# Altium PCB LTC6811_proto.PcbDoc
Units mm, origin at the board's own origin, x right, y up, seen from the top; angles counter-clockwise.
Board outline 30 x 86 mm, 2 copper layers (Top Layer, Bottom Layer), stack 1.57 mm thick; 8 components, 64 nets, 128 pads, 0 vias.
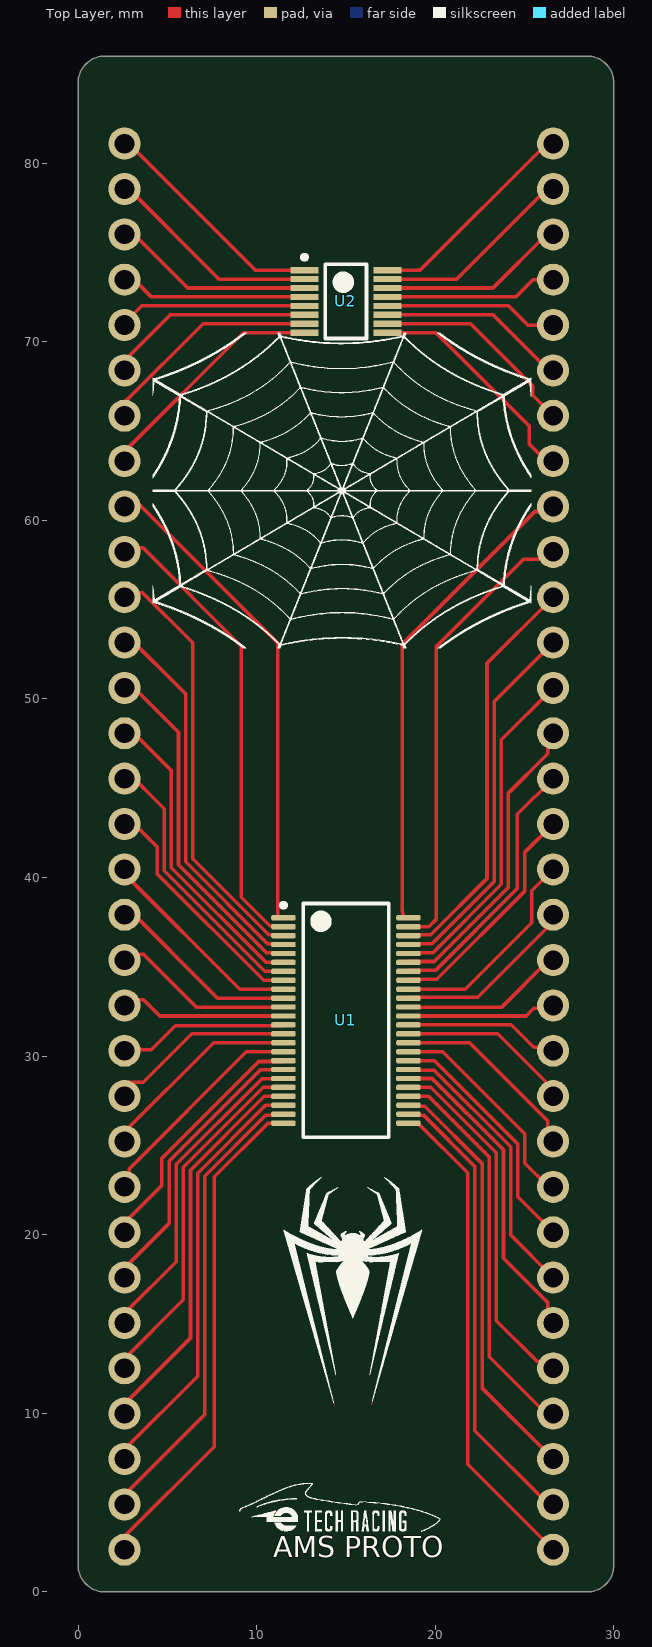
[diagram p0: Top Layer view]
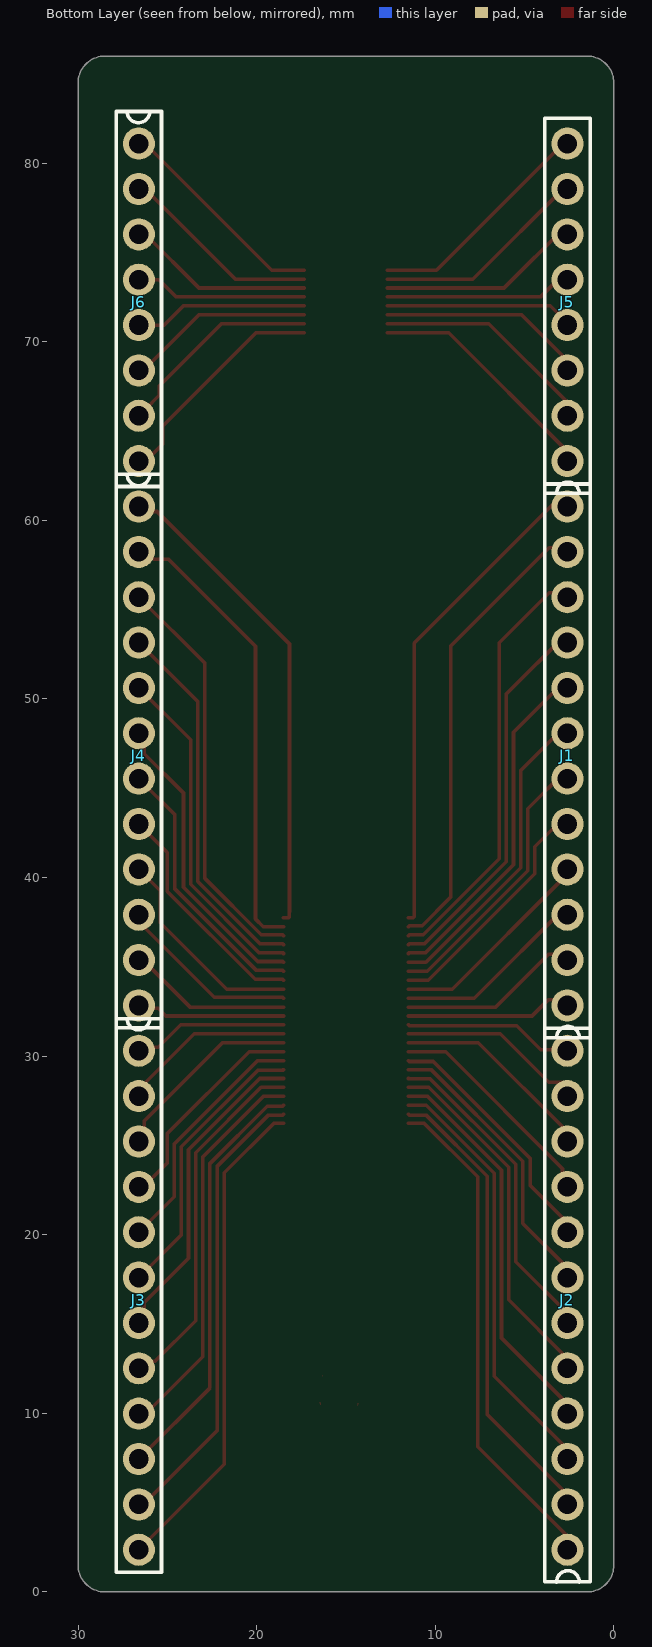
[diagram p1: Bottom Layer view, seen from below]
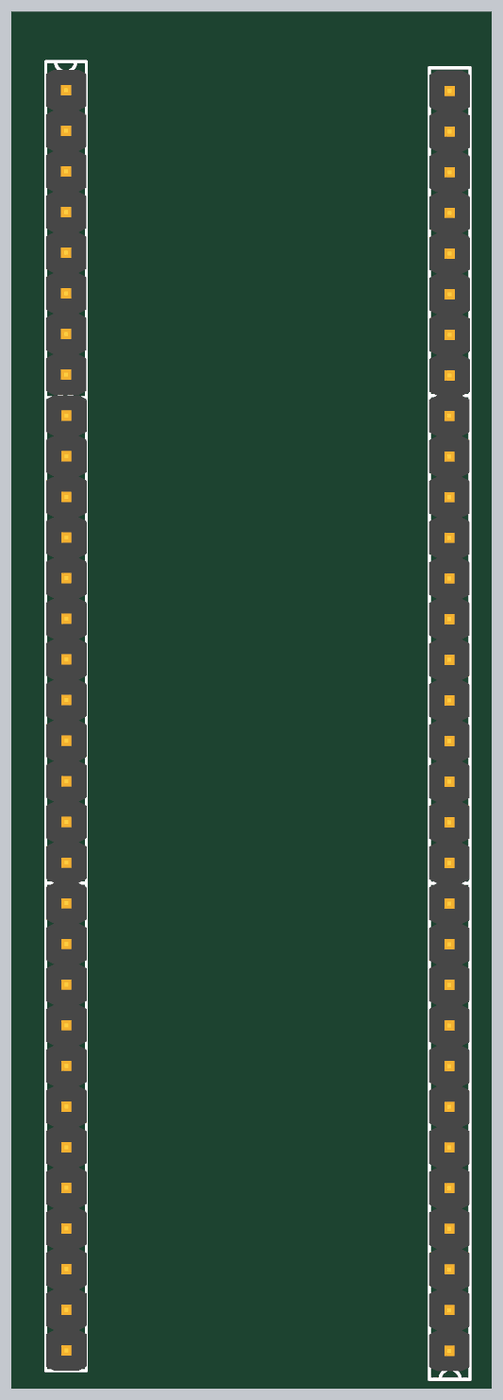
[diagram p2: 3D render of the assembled board from below, using the file's embedded part models]

## Layer stack, top to bottom
Top Solder: solder mask 0.01, Solder Resist, Dk 3.5
Top Layer: signal copper 0.035
Dielectric 1: dielectric 1.5, FR-4, Dk 4.8
Bottom Layer: signal copper 0.035
Bottom Solder: solder mask 0.01, Solder Resist, Dk 3.5

## Board outline
0,1.5 0,84.5 cw(c1.5,84.5) 1.5,86 28.5,86 cw(c28.5,84.5) 30,84.5 30,1.5 cw(c28.5,1.5) 28.5,0 1.5,0 cw(c1.5,1.5)

## Design rules (kind name [scope] priority, off if disabled: settings)
Clearance [All] p1: gap=0.2 ignorepadtopadclearanceinfootprint=FALSE
PolygonConnect [All] p1: connectstyle=Relief reliefconductorwidth=0.254 reliefentries=4 polygonreliefangle="90 Angle" airgapwidth=0.254
RoutingVias [All] p1: holewidth=0.711 width=1.27 viastyle="Through Hole" minholewidth=0.711 minwidth=1.27 maxholewidth=0.711 maxwidth=1.27
SolderMaskExpansion [All] p1: expansion=0.102 istentingtop=FALSE
Width [All] p1: maxlimit=0.5 minlimit=0.2 preferedwidth=0.254
30 further rules are at their usual default settings.

## Classes and differential pairs
component class Sheet1: J1 J2 J3 J4 J5 J6 U1

## Components (designator, comment, footprint, x,y, rotation, side; value= is the part's Value field where it differs from the comment)
J1 "61301211121" J_Pinheader_1x12 2.6,45.54 r0 bottom
J2 "61301211121" J_Pinheader_1x12 2.6,15.06 r0 bottom
J3 "61301211121" J_Pinheader_1x12 26.6,17.6 r180 bottom
J4 "61301211121" J_Pinheader_1x12 26.6,48.08 r180 bottom
J5 "61301211121" J_Pinheader_1x8 2.6,76.02 r0 bottom
J6 "61301211121" J_Pinheader_1x8 26.6,68.4 r180 bottom
U1 "LTC6811-1" U_LTC6811G-2 15,32 r0 top
U2 "LTC6820" LTC6820 15,72.263 r0 top

## Footprints (in the part's own frame and the unit in brackets; to place one, negate y for a bottom-side part, rotate by r counter-clockwise, add the part's x,y. Pads: shape width x height; smd on the part's side, far side on the other; paste and mask are expansions set on the pad)
J_Pinheader_1x8 [mm]
  round 1.8 hole 1.1: 1(0,12.7) 2(0,10.16) 3(0,7.62) 4(0,5.08) 5(0,2.54) 6(0,0) 7(0,-2.54) 8(0,-5.08)
  silkscreen extent -1.27,-6.5 1.27,14.5, body extent -1.26,-6.32 1.28,14, height 8.77
J_Pinheader_1x12 [mm]
  round 1.8 hole 1.1: 1(0,12.7) 2(0,10.16) 3(0,7.62) 4(0,5.08) 5(0,2.54) 6(0,0) 7(0,-2.54) 8(0,-5.08) 9(0,-7.62) 10(0,-10.16) 11(0,-12.7) 12(0,-15.24)
  silkscreen extent -1.27,-16.5 1.27,14.5, body extent -1.25,-16.5 1.29,13.98, height 8.77
LTC6820 [mm]
  rect 1.55x0.35 smd: 1(-2.325,1.75) 2(-2.325,1.25) 3(-2.325,0.75) 4(-2.325,0.25) 5(-2.325,-0.25) 6(-2.325,-0.75) 7(-2.325,-1.25) 8(-2.325,-1.75) 9(2.325,-1.75) 10(2.325,-1.25) 11(2.325,-0.75) 12(2.325,-0.25) 13(2.325,0.25) 14(2.325,0.75) 15(2.325,1.25) 16(2.325,1.75)
  silkscreen extent -2.45,-2.08 1.15,2.6, body extent -2.45,-2.05 2.45,2.05, height 1.1
U_LTC6811G-2 [mm] "SSOP, 48-Leads, Body 12,80x5,30mm, Pitch 0,50mm, IPC Medium Density"
  rrect50% 1.37x0.3 smd: 1(-3.5,5.75) 2(-3.5,5.25) 3(-3.5,4.75) 4(-3.5,4.25) 5(-3.5,3.75) 6(-3.5,3.25) 7(-3.5,2.75) 8(-3.5,2.25) 9(-3.5,1.75) 10(-3.5,1.25) 11(-3.5,0.75) 12(-3.5,0.25) 13(-3.5,-0.25) 14(-3.5,-0.75) 15(-3.5,-1.25) 16(-3.5,-1.75) 17(-3.5,-2.25) 18(-3.5,-2.75) 19(-3.5,-3.25) 20(-3.5,-3.75) 21(-3.5,-4.25) 22(-3.5,-4.75) 23(-3.5,-5.25) 24(-3.5,-5.75) 25(3.5,-5.75) 26(3.5,-5.25) 27(3.5,-4.75) 28(3.5,-4.25) 29(3.5,-3.75) 30(3.5,-3.25) 31(3.5,-2.75) 32(3.5,-2.25) 33(3.5,-1.75) 34(3.5,-1.25) 35(3.5,-0.75) 36(3.5,-0.25) 37(3.5,0.25) 38(3.5,0.75) 39(3.5,1.25) 40(3.5,1.75) 41(3.5,2.25) 42(3.5,2.75) 43(3.5,3.25) 44(3.5,3.75) 45(3.5,4.25) 46(3.5,4.75) 47(3.5,5.25) 48(3.5,5.75)
  silkscreen extent -3.62,-6.55 2.4,6.57, body extent -3.9,-6.4 3.9,6.4, height 2

## Part data
J1 J2 J3 J4: library part J_Pinheader_1x12, "THT Vertical Pin Header WR-PHD, Pitch 2.54 mm, Single Row, 12 pins", Color=Black, Manufacturer 1="Wurth Electronics", Category=Connectors, ComponentLink1Description=http://www.farnell.com/cad/1737268.pdf?src-supplier=Element14, ComponentLink1URL=http://www.farnell.com/cad/1737268.pdf?src-supplier=Element14, ComponentLink2Description=https://katalog.we-online.de/em/datasheet/6130xx11121.pdf?src-supplier=Digi-Key, ComponentLink2URL=https://katalog.we-online.de/em/datasheet/6130xx11121.pdf?src-supplier=Digi-Key, Connector Type="Male Pin", Contact Material=Copper, Contact Mating Length=0.236inch, Contact Plating=Gold, Gender=Male, Manufacturer Part Number 1=61301211121, Mount="Through Hole", Number of Contacts=12, Number of Positions=12, Number of Rows=1, Packaging=Bulk, Pitch=0.1inch, Pricing 1="1=0,57000, 10=0,48400, 25=0,40400, 50=0,33700, 100=0,30600, 1000=0,27800 (USD)", REACH SVHC=Unknown, RoHS=Yes, RoHS Compliant=Yes, Stock 1=2124, Supplier 1=Digi-Key, Termination=Solder
J5 J6: library part J_Pinheader_1x8, "THT Vertical Pin Header WR-PHD, Pitch 2.54 mm, Single Row, 12 pins", Color=Black, Manufacturer 1="Wurth Electronics", Category=Connectors, ComponentLink1Description=http://www.farnell.com/cad/1737268.pdf?src-supplier=Element14, ComponentLink1URL=http://www.farnell.com/cad/1737268.pdf?src-supplier=Element14, ComponentLink2Description=https://katalog.we-online.de/em/datasheet/6130xx11121.pdf?src-supplier=Digi-Key, ComponentLink2URL=https://katalog.we-online.de/em/datasheet/6130xx11121.pdf?src-supplier=Digi-Key, Connector Type="Male Pin", Contact Material=Copper, Contact Mating Length=0.236inch, Contact Plating=Gold, Gender=Male, Manufacturer Part Number 1=61301211121, Mount="Through Hole", Number of Contacts=12, Number of Positions=12, Number of Rows=1, Packaging=Bulk, Pitch=0.1inch, Pricing 1="1=0,57000, 10=0,48400, 25=0,40400, 50=0,33700, 100=0,30600, 1000=0,27800 (USD)", REACH SVHC=Unknown, RoHS=Yes, RoHS Compliant=Yes, Stock 1=2124, Supplier 1=Digi-Key, Termination=Solder
U1: library part U_LTC6811-1, "12 Channel Multicell Battery Monitor with Daisy Chain Interface, Generation 4", Case/Package=SSOP, Manufacturer="Analog Devices / Linear Technology", Manufacturer 1="Analog Devices", Manufacturer Part Number=LTC6811HG-1#PBF, Supplier Part Number 1=505-LTC6811HG-1#PBF-ND, .Creator=GP, Category="Battery Management", ComponentLink1Description=Datasheet, ComponentLink1URL=https://www.analog.com/media/en/technical-documentation/data-sheets/ltc6811-1-6811-2.pdf, ComponentLink2Description="Where buy it", ComponentLink2URL=https://www.mouser.es/ProductDetail/Analog-Devices/LTC6811IG-23ZZTRPBF?qs=byeeYqUIh0NWJgxDt7RX5g%3D%3D, ComponentLink3Description=http://www.linear.com/docs/55980?src-supplier=Digi-Key, ComponentLink3URL=http://www.linear.com/docs/55980?src-supplier=Digi-Key, ComponentLink4Description=https://datasheet.octopart.com/LTC6811HG-1%23PBF-Analog-Devices-datasheet-138896417.pdf?src-supplier=Upverter, ComponentLink4URL=https://datasheet.octopart.com/LTC6811HG-1%23PBF-Analog-Devices-datasheet-138896417.pdf?src-supplier=Upverter, ComponentLink5Description=https://datasheet.octopart.com/LTC6811HG-1%23PBF-Linear-Technology-datasheet-66874450.pdf?src-supplier=Linear+Technology, ComponentLink5URL=https://datasheet.octopart.com/LTC6811HG-1%23PBF-Linear-Technology-datasheet-66874450.pdf?src-supplier=Linear+Technology, ComponentLink6Description=https://sigma.octopart.com/57702806/technical_drawing/Linear-Technology-LTC6811HG-1%23PBF.pdf?src-supplier=Linear+Technology, ComponentLink6URL=https://sigma.octopart.com/57702806/technical_drawing/Linear-Technology-LTC6811HG-1%23PBF.pdf?src-supplier=Linear+Technology, ComponentLink7Description=https://datasheet.octopart.com/LTC6811HG-1%23PBF-Analog-Devices-datasheet-138896417.pdf?src-supplier=Element14, ComponentLink7URL=https://datasheet.octopart.com/LTC6811HG-1%23PBF-Analog-Devices-datasheet-138896417.pdf?src-supplier=Element14, Manufacturer Part Number 1=LTC6811-1, Pricing 2="1=21,6, 10=19,92, 50=19,02, 100=19,02, 1000=15,13, 10000=15,13 (USD)", RoHS=Yes, RoHS Compliant=Yes, Stock 2=3108, Supplier 1=Digi-Key, Supplier 2=Mouser, Supplier Part Number 2=584-LTC6811HG-1#PBF
U2: library part U_LTC6820

## Nets (pads, with @x,y where several pads share a name; then routed paths per layer and width w, separated by ;. In a path a pad name is that pad's centre, name@x,y a point inside that pad or via, vN(x,y) a via of type N, cw(c..) or ccw(c..) an arc to the next point about the centre after c; other vN are vias at no path point)
NetJ1_1: J1.1 U1.12 | length 9.4
  Top Layer w0.2: J1.1@2.6,33.38 2.833,33.147 3.683,33.147 4.58,32.25 U1.12
NetJ1_2: J1.2 U1.11 | length 10.2
  Top Layer w0.2: J1.2@2.6,35.92 2.824,35.696 3.674,35.696 6.62,32.75 U1.11
NetJ1_3: J1.3 U1.10 | length 11.1
  Top Layer w0.2: J1.3@2.6,38.46 7.81,33.25 U1.10
NetJ1_4: J1.4 U1.9 | length 12.4
  Top Layer w0.2: J1.4@2.6,41 2.848,40.752 2.848,39.951 9.049,33.75 U1.9
NetJ1_5: J1.5 U1.8 | length 13.6
  Top Layer w0.2: J1.5@2.6,43.54 4.42,41.72 4.42,40.22 10.391,34.25 U1.8
NetJ1_6: J1.6 U1.7 | length 15.6
  Top Layer w0.2: J1.6@2.6,46.08 4.82,43.86 4.82,40.386 10.456,34.75 U1.7
NetJ1_7: J1.7 U1.6 | length 17.6
  Top Layer w0.2: J1.7@2.6,48.62 5.22,46 5.22,40.552 10.522,35.25 U1.6
NetJ1_8: J1.8 U1.5 | length 19.6
  Top Layer w0.2: J1.8@2.6,51.16 5.62,48.14 5.62,40.717 10.538,35.8 11.45,35.8 U1.5
NetJ1_9: J1.9 U1.4 | length 21.6
  Top Layer w0.2: J1.9@2.6,53.7 6.02,50.28 6.02,40.883 10.603,36.3 11.45,36.3 U1.4
NetJ1_10: J1.10 U1.3 | length 24.1
  Top Layer w0.2: J1.10@2.6,56.24 2.887,55.953 3.61,55.953 6.42,53.143 6.42,41.049 10.669,36.8 11.45,36.8 U1.3
NetJ1_11: J1.11 U1.2 | length 26.1
  Top Layer w0.2: J1.11@2.6,58.78 2.906,58.474 3.629,58.474 9.144,52.959 9.144,38.891 10.735,37.3 11.45,37.3 U1.2
NetJ1_12: J1.12 U1.1 | length 27.6
  Top Layer w0.2: J1.12@2.6,61.32 2.988,61.32 11.176,53.132 11.176,37.8 11.226,37.75 U1.1
NetJ2_1: J2.1 U1.24 | length 27.5
  Top Layer w0.2: J2.1@2.6,2.9 2.6,3.108 7.62,8.128 7.62,23.241 10.629,26.25 U1.24
NetJ2_2: J2.2 U1.23 | length 25.5
  Top Layer w0.2: J2.2@2.6,5.44 7.093,9.933 7.093,23.28 10.515,26.702 11.452,26.702 U1.23
NetJ2_3: J2.3 U1.22 | length 23.5
  Top Layer w0.2: J2.3@2.6,7.98 6.693,12.073 6.693,23.445 10.498,27.25 U1.22
NetJ2_4: J2.4 U1.21 | length 21.5
  Top Layer w0.2: J2.4@2.6,10.52 6.293,14.213 6.293,23.611 10.432,27.75 U1.21
NetJ2_5: J2.5 U1.20 | length 19.5
  Top Layer w0.2: J2.5@2.6,13.06 5.893,16.353 5.893,23.777 10.366,28.25 U1.20
NetJ2_6: J2.6 U1.19 | length 17.5
  Top Layer w0.2: J2.6@2.6,15.6 5.493,18.493 5.493,23.942 10.294,28.743 11.493,28.743 U1.19
NetJ2_7: J2.7 U1.18 | length 15.5
  Top Layer w0.2: J2.7@2.6,18.14 5.093,20.633 5.093,24.108 10.235,29.25 U1.18
NetJ2_8: J2.8 U1.17 | length 13.5
  Top Layer w0.2: J2.8@2.6,20.68 4.693,22.773 4.693,24.274 10.119,29.7 10.8,29.7 11.45,29.7 U1.17
NetJ2_9: J2.9 U1.16 | length 12
  Top Layer w0.2: J2.9@2.6,23.22 2.675,23.22 2.875,23.419 2.875,23.703 9.422,30.25 U1.16
NetJ2_10: J2.10 U1.15 | length 11
  Top Layer w0.2: J2.10@2.6,25.76 7.59,30.75 U1.15
NetJ2_11: J2.11 U1.14 | length 10.1
  Top Layer w0.2: J2.11@2.6,28.3 2.845,28.545 3.653,28.545 6.358,31.25 U1.14
NetJ2_12: J2.12 U1.13 | length 9.7
  Top Layer w0.2: J2.12@2.6,30.84 3.03,30.84 3.517,30.353 4.087,30.353 5.434,31.7 10.8,31.7 11.45,31.7 U1.13
NetJ3_1: J3.1 U1.36 | length 8.7
  Top Layer w0.2: U1.36 24.257,31.75 25.517,30.49 26.41,30.49 J3.1
NetJ3_2: J3.2 U1.35 | length 9.8
  Top Layer w0.2: U1.35 19.085,31.25 23.499,31.25 26.6,28.149 J3.2
NetJ3_3: J3.3 U1.34 | length 10.9
  Top Layer w0.2: U1.34 21.913,30.75 26.294,26.369 26.294,25.526 J3.3
NetJ3_4: J3.4 U1.33 | length 12.2
  Top Layer w0.2: U1.33 20.423,30.25 25.019,25.654 25.019,24.003 26.342,22.68 J3.4
NetJ3_5: J3.5 U1.32 | length 13.8
  Top Layer w0.2: U1.32 19.953,29.75 24.619,25.084 24.619,22.121 J3.5
NetJ3_6: J3.6 U1.31 | length 15.8
  Top Layer w0.2: U1.31 18.55,29.2 19.937,29.2 24.219,24.918 24.219,19.981 J3.6
NetJ3_7: J3.7 U1.30 | length 17.8
  Top Layer w0.2: U1.30 19.822,28.75 23.819,24.753 23.819,18.684 26.294,16.209 26.294,15.366 J3.7
NetJ3_8: J3.8 U1.29 | length 20.1
  Top Layer w0.2: U1.29 19.756,28.25 23.419,24.587 23.419,15.189 25.695,12.913 25.775,12.913 26.167,12.52 J3.8
NetJ3_9: J3.9 U1.28 | length 22
  Top Layer w0.2: U1.28 19.621,27.75 23.019,24.352 23.019,13.176 26.215,9.98 J3.9
NetJ3_10: J3.10 U1.27 | length 23.7
  Top Layer w0.2: U1.27 18.55,27.2 19.409,27.2 22.619,23.99 22.619,11.421 J3.10
NetJ3_11: J3.11 U1.26 | length 25.8
  Top Layer w0.2: U1.26 18.55,26.7 19.343,26.7 22.219,23.824 22.219,9.023 26.342,4.9 J3.11
NetJ3_12: J3.12 U1.25 | length 27.6
  Top Layer w0.2: U1.25 19.035,26.25 21.819,23.466 21.819,7.141 J3.12
NetJ4_1: J4.1 U1.48 | length 27.3
  Top Layer w0.2: U1.48 18.217,37.75 18.167,37.8 18.167,38.083 18.161,38.089 18.161,53.08 25.582,60.501 26.321,60.501 J4.1
NetJ4_2: J4.2 U1.47 | length 25.7
  Top Layer w0.2: U1.47 19.632,37.25 20.066,37.684 20.066,52.956 24.947,57.837 25.764,57.837 26.167,58.24 J4.2
NetJ4_3: J4.3 U1.46 | length 23
  Top Layer w0.2: U1.46 18.55,36.8 19.748,36.8 22.898,39.95 22.898,51.998 J4.3
NetJ4_4: J4.4 U1.45 | length 21
  Top Layer w0.2: U1.45 18.55,36.3 19.813,36.3 23.298,39.785 23.298,49.858 J4.4
NetJ4_5: J4.5 U1.44 | length 19
  Top Layer w0.2: U1.44 18.55,35.8 19.879,35.8 23.698,39.619 23.698,47.718 J4.5
NetJ4_6: J4.6 U1.43 | length 17
  Top Layer w0.2: U1.43 18.55,35.3 19.945,35.3 24.098,39.453 24.098,44.735 26.294,46.931 26.294,47.774 J4.6
NetJ4_7: J4.7 U1.42 | length 15
  Top Layer w0.2: U1.42 18.55,34.8 20.01,34.8 24.6,39.39 24.6,43.54 J4.7
NetJ4_8: J4.8 U1.41 | length 13
  Top Layer w0.2: U1.41 18.55,34.3 20.076,34.3 25,39.224 25,41.4 J4.8
NetJ4_9: J4.9 U1.40 | length 11.9
  Top Layer w0.2: U1.40 21.685,33.75 25.4,37.465 25.4,39.26 J4.9
NetJ4_10: J4.10 U1.39 | length 10.3
  Top Layer w0.2: U1.39 18.55,33.3 19.2,33.3 22.378,33.3 26.6,37.522 J4.10
NetJ4_11: J4.11 U1.38 | length 9.2
  Top Layer w0.2: U1.38 23.733,32.75 26.363,35.38 J4.11
NetJ4_12: J4.12 U1.37 | length 8.3
  Top Layer w0.2: U1.37 25.086,32.25 25.517,32.681 26.441,32.681 J4.12
NetJ5_1: J5.1 U2.8 | length 12.8
  Top Layer w0.2: J5.1@2.6,63.86 9.253,70.513 U2.8
NetJ5_2: J5.2 U2.7 | length 12.1
  Top Layer w0.2: J5.2@2.6,66.4 2.6,66.608 7.005,71.013 U2.7
NetJ5_3: J5.3 U2.6 | length 11.1
  Top Layer w0.2: J5.3@2.6,68.94 5.173,71.513 U2.6
NetJ5_4: J5.4 U2.5 | length 10.3
  Top Layer w0.2: J5.4@2.6,71.48 3.033,71.48 3.566,72.013 U2.5
NetJ5_5: J5.5 U2.4 | length 10.7
  Top Layer w0.2: J5.5@2.6,74.02 4.107,72.513 U2.4
NetJ5_6: J5.6 U2.3 | length 11.5
  Top Layer w0.2: J5.6@2.6,76.56 6.147,73.013 U2.3
NetJ5_7: J5.7 U2.2 | length 12.6
  Top Layer w0.2: J5.7@2.6,79.1 2.6,78.807 7.894,73.513 U2.2
NetJ5_8: J5.8 U2.1 | length 13.4
  Top Layer w0.2: J5.8@2.6,81.64 2.6,81.347 9.934,74.013 U2.1
NetJ6_1: J6.1 U2.16 | length 12.2
  Top Layer w0.2: U2.16 19.149,74.013 26.236,81.1 J6.1
NetJ6_2: J6.2 U2.15 | length 11.4
  Top Layer w0.2: U2.15 21.189,73.513 26.236,78.56 J6.2
NetJ6_3: J6.3 U2.14 | length 10.5
  Top Layer w0.2: U2.14 23.229,73.013 26.236,76.02 J6.3
NetJ6_4: J6.4 U2.13 | length 9.7
  Top Layer w0.2: U2.13 24.507,72.513 25.474,73.48 J6.4
NetJ6_5: J6.5 U2.12 | length 9.7
  Top Layer w0.2: U2.12 24.098,72.013 25.171,70.94 J6.5
NetJ6_6: J6.6 U2.11 | length 10.6
  Top Layer w0.2: U2.11 23.229,71.513 26.342,68.4 J6.6
NetJ6_7: J6.7 U2.10 | length 12.3
  Top Layer w0.2: U2.10 21.971,71.013 25.443,67.54 ccw(c26.6,67.86) 25.451,67.513 25.451,67.005 26.219,66.237 26.219,66.133 26.6,65.753 J6.7@26.6,65.32
NetJ6_8: J6.8 U2.9 | length 13.6
  Top Layer w0.2: U2.9 20.038,70.513 25.273,65.278 25.273,64.262 26.6,62.935 J6.8@26.6,62.78 ; J6.8@26.294,63.519 26.493,63.32 J6.8

## Other copper
Top Layer:
  region: 14.58,22.65 14.57,22.651 14.572,22.658 14.576,22.661 14.585,22.663 14.589,22.661 14.59,22.656 14.587,22.652 14.582,22.65
  region: 14.328,10.515 14.324,10.517 14.318,10.531 14.32,10.567 14.324,10.568 14.327,10.565 14.331,10.554 14.333,10.545 14.331,10.516 14.33,10.515
  region: 16.405,10.429 16.407,10.433 16.41,10.432 16.408,10.412 16.407,10.411 16.404,10.421 16.404,10.427
  region: 16.325,12.138 16.328,12.135 16.326,12.095 16.321,12.087 16.317,12.088 16.32,12.13 16.324,12.137
  region: 14.345,10.474 14.348,10.475 14.351,10.465 14.353,10.456 14.349,10.439 14.348,10.437 14.345,10.441 14.342,10.45 14.345,10.472
  region: 16.186,22.661 16.19,22.659 16.193,22.656 16.192,22.65 16.177,22.652 16.174,22.656 16.176,22.662 16.184,22.663 16.185,22.662
  region: 16.432,10.494 16.43,10.487 16.427,10.486 16.423,10.498 16.426,10.523 16.431,10.526 16.435,10.523 16.437,10.514 16.435,10.496 16.433,10.495
  region: 16.442,10.557 16.441,10.596 16.45,10.611 16.456,10.617 16.459,10.615 16.457,10.571 16.448,10.556 16.444,10.555 16.443,10.556

## Silkscreen, mask and mechanical layers (free items; w line width, h text height)
Top Overlay:
  drawing of 17 lines, arcs and shapes, not listed
  text "AMS PROTO" at 10.918,1.535 h2